# Altium PCB SSR_MODULE.PcbDoc
Units mil, origin at the board's own origin, x right, y up, seen from the top; angles counter-clockwise.
Board outline 1070 x 960 mil, 2 copper layers (Top Layer, Bottom Layer); 13 components, 10 nets, 27 pads, 0 vias.
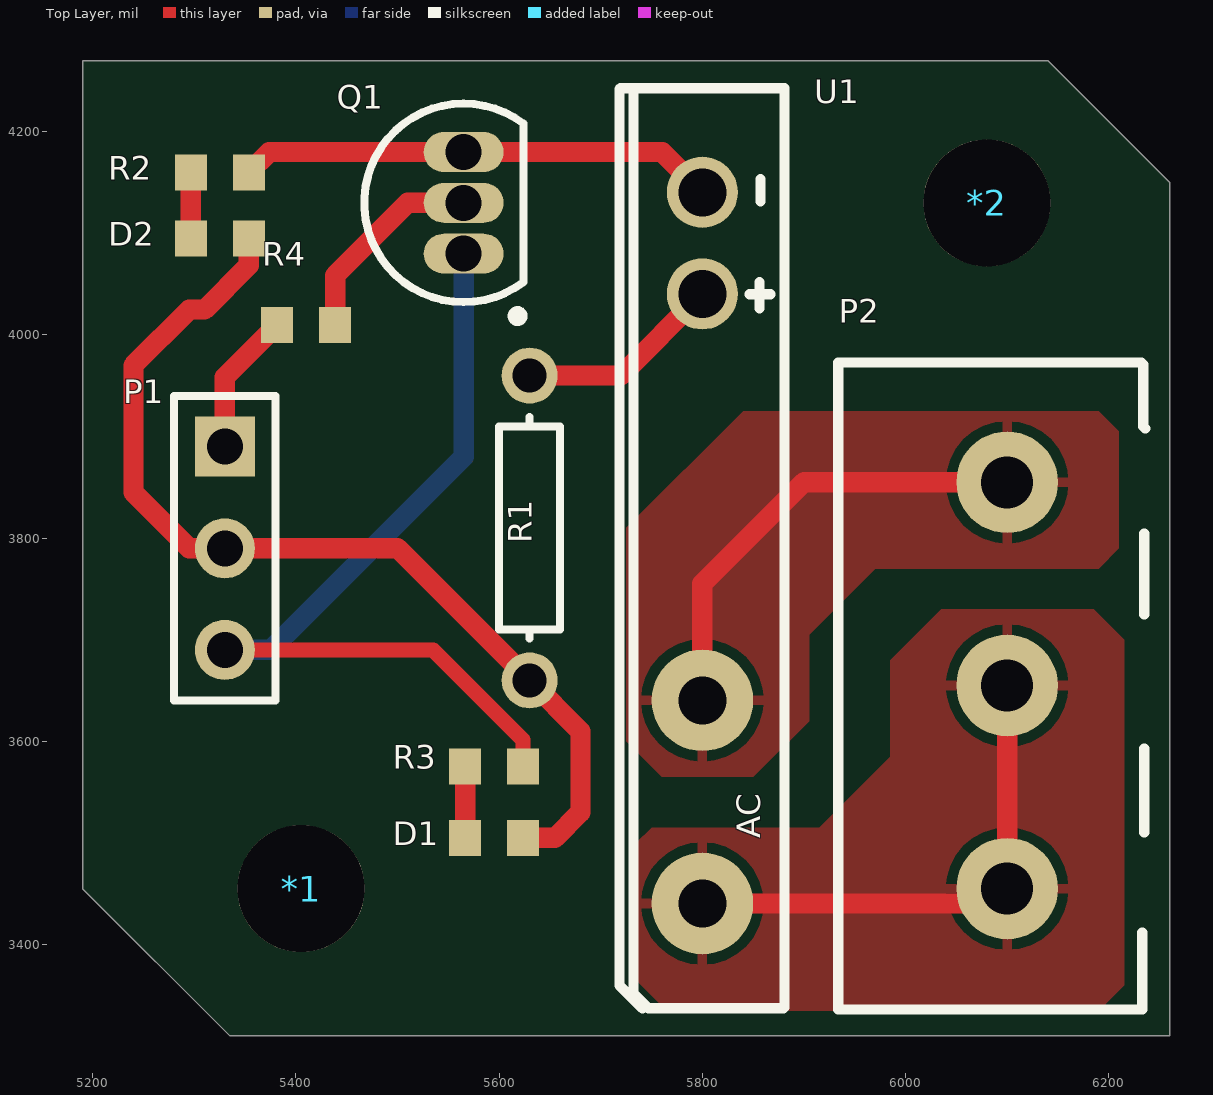
[diagram p0: Top Layer view]
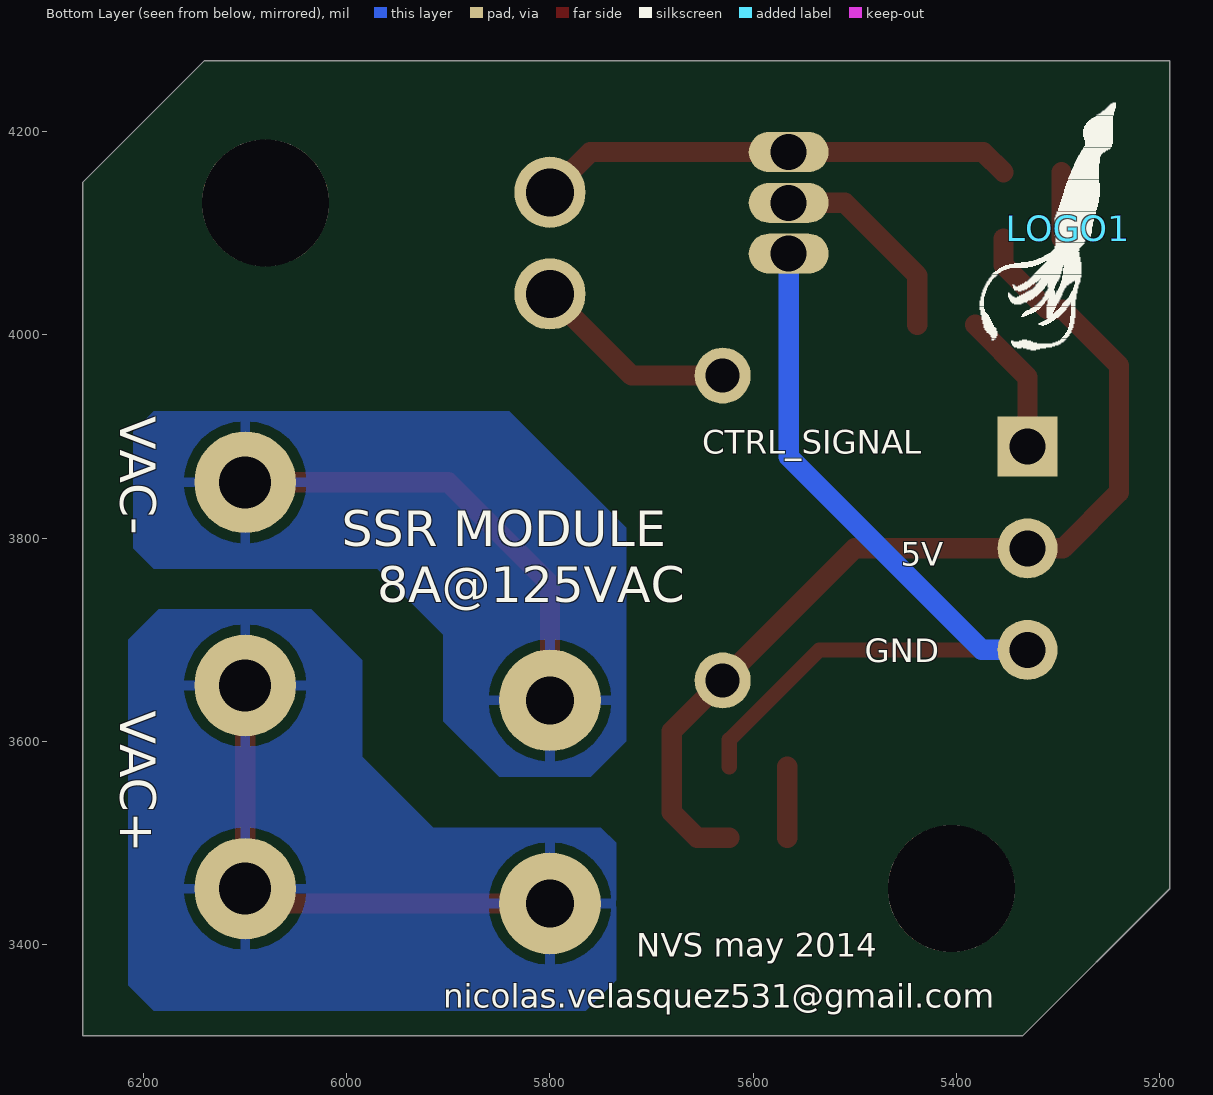
[diagram p1: Bottom Layer view, seen from below]

## Layer stack, top to bottom
Top Layer: signal copper 1.4
Dielectric: dielectric 12.6, FR-4, Dk 4.8
Bottom Layer: signal copper 1.4

## Board outline
5190,3455 5335,3310 6260,3310 6260,4150 6140,4270 5190,4270

## Design rules (kind name [scope] priority, off if disabled: settings)
Clearance [All] p1: gap=10
PolygonConnect [All] p1: connectstyle=Relief reliefconductorwidth=10 reliefentries=4 polygonreliefangle="90 Angle" airgapwidth=10
RoutingVias [All] p1: holewidth=28 width=50 viastyle="Through Hole" minholewidth=28 minwidth=50 maxholewidth=28 maxwidth=50
SolderMaskExpansion [All] p1: expansion=4
Width [All] p1: maxlimit=20 minlimit=10 preferedwidth=15
28 further rules are at their usual default settings.

## Components (designator, comment, footprint, x,y, rotation, side; value= is the part's Value field where it differs from the comment)
*1 "MountingHole-1/8in" MoutingHole-1/8in 5405,3455 r0 top
*2 "MountingHole-1/8in" MoutingHole-1/8in 6080,4130 r0 top
D1 "Green" R0603_L 5595,3505 r180 top
D2 "Green" R0603_L 5325,4095 r180 top
LOGO1 "Logo_DeepSea" DeepSea_logo1 5290,4105 r180 bottom
P1 "Header 3" HDR1X3 5330,3890 r270 top
P2 "BLOCK_CONNx3" BLOCK_CONNx3 6100,3655 r90 top
Q1 "2N3904" TO-92A 5565,4130 r0 top
R1 "Res1" AXIAL-0.3 5630,3810 r270 top
R2 "R_SMD" R0603_L 5325,4160 r180 top
R3 "R_SMD" R0603_L 5595,3575 r0 top
R4 "R_SMD" R0603_L 5410,4010 r180 top
U1 "S108T02F" ZC_4-ZSIP 5800,3790 r90 top

## Footprints (in the part's own frame and the unit in brackets; to place one, negate y for a bottom-side part, rotate by r counter-clockwise, add the part's x,y. Pads: shape width x height; smd on the part's side, far side on the other; paste and mask are expansions set on the pad)
AXIAL-0.3 [mm] "Axial Device, Thru-Hole; 2 Leads; 0.3 in Pin Spacing"
  round 1.4 hole 0.85: 1(-3.81,0) 2(3.81,0)
  silkscreen extent -2.77,-0.76 2.77,0.76
BLOCK_CONNx3 [mm]
  round 2.54 hole 1.3: 1(-5.08,0) 2(0,0) 3(5.08,0)
  silkscreen extent -8.1,-3.45 8.07,4.23, body extent -8.1,-3.4 8.1,4.2, height 10
DeepSea_logo1 [mil]
  silkscreen extent -87,-120 47,123
HDR1X3 [mm] "Connector; Header; 3 Position"
  rect 1.5x1.5 hole 0.9: 1(0,0)
  round 1.5 hole 0.9: 2(2.54,0) 3(5.08,0)
  silkscreen extent -1.27,-1.27 6.35,1.27
MoutingHole-1/8in [mil]
  round 125 hole 125: 0(0,0)
R0603_L [mm] "Chip Resistor, 2-Leads, Body 1,60x0,85mm, IPC High Density"
  rect 0.8x0.9 smd: 1(-0.725,0) 2(0.725,0)
  body extent -0.87,-0.48 0.87,0.48, height 0.45
TO-92A [mm] "TO, Flat Index; 3 In-Line, Axial Leads; Body Dia. 4.5mm; Leads 0.51 x 0.48 mm (max)"
  oval 2x1 hole 0.9: 1(0,-1.27) 2(0,0) 3(0,1.27)
  silkscreen extent -2.48,-2.95 1.5,2.48, body extent -2.5,-2.5 1.5,2.5, height 6.86
ZC_4-ZSIP [mm]
  round 2.54 hole 1.2: 1(-8.88,0) 2(-3.8,0)
  round 1.778 hole 1.2: 3(6.36,0) 4(8.9,0)
  silkscreen extent -11.5,-2.05 11.5,2.07, body extent -11.5,-2 11.5,2, height 17

## Part data
D1 D2: library part LED_SMD
P1: "Header, 3-Pin"
P2: "TERM BLOCK 5.08MM VERT 3POS PCB"
Q1: "NPN General Purpose Amplifier"
R1: "Resistor"
U1: "RELAY SSR 120VAC 8A ZC 4-SIP"

## Nets (pads, with @x,y where several pads share a name; then routed paths per layer and width w, separated by ;. In a path a pad name is that pad's centre, name@x,y a point inside that pad or via, vN(x,y) a via of type N, cw(c..) or ccw(c..) an arc to the next point about the centre after c; other vN are vias at no path point)
5V: D1.1 D2.1 P1.2 R1.2 | length 990
  Top Layer w20: D2.1 5353.54,4068.54 5310,4025 5295,4025 5240,3970 5240,3845 5295,3790 P1.2 5500,3790 R1.2 5680,3610 5680,3530 5655,3505 D1.1
CTRL_SIGNAL: P1.1 R4.2 | length 141.3
  Top Layer w20: P1.1 5330,3958.54 R4.2
GND: P1.3 Q1.1 R3.2 | length 870.4
  Top Layer w15: P1.3 5535,3690 5623.54,3601.46 R3.2
  Bottom Layer w20: P1.3 5375,3690 5565,3880 Q1.1
NetD1_2: D1.2 R3.1 | length 70
  Top Layer w20: D1.2 R3.1
NetD2_2: D2.2 R2.2 | length 65
  Top Layer w20: D2.2 R2.2
NetQ1_2: Q1.2 R4.1 | length 204.6
  Top Layer w20: R4.1 5438.54,4058.54 5510,4130 Q1.2
NetQ1_3: Q1.3 R2.1 U1.4 | length 471.1
  Top Layer w20: R2.1 5373.54,4180 Q1.3 5760.39,4180 U1.4
NetR1_1: R1.1 U1.3 | length 203.3
  Top Layer w20: R1.1 5719.61,3960 U1.3
VAC+: P2.1 P2.2 U1.1 | length 506.1
  Top Layer w20: U1.1 6085.39,3440.39 P2.1 P2.2
VAC-: P2.3 U1.2 | length 456
  Top Layer w20: U1.2 5800,3755 5900,3855 P2.3
pads on no net: *1.0 *2.0

## Polygon pours and split planes (outlines as drawn)
VAC- on Top Layer "Top Layer-No Net" (solid, remove dead copper, pour order 6): 5900,3925 6190,3925 6210,3905 6210,3790 6190,3770 5970,3770 5905,3705 5905,3620 5850,3565 5760,3565 5725,3600 5725,3810 5840,3925 5900,3925
VAC+ on Top Layer "Top Layer-No Net" (solid, remove dead copper, pour order 8): 5770,3515 5915,3515 5980,3580 5985,3585 5985,3670 5985,3680 6035,3730 6155,3730 6185,3730 6215,3700 6215,3380 6215,3360 6190,3335 5765,3335 5735,3365 5735,3500 5750,3515
VAC- on Bottom Layer "Top Layer-No Net" (solid, remove dead copper, pour order 5): 5900,3925 6190,3925 6210,3905 6210,3790 6190,3770 5970,3770 5905,3705 5905,3620 5850,3565 5760,3565 5725,3600 5725,3810 5840,3925 5900,3925
VAC+ on Bottom Layer "Top Layer-No Net" (solid, remove dead copper, pour order 7): 5770,3515 5915,3515 5980,3580 5985,3585 5985,3670 5985,3680 6035,3730 6155,3730 6185,3730 6215,3700 6215,3380 6215,3360 6190,3335 5765,3335 5735,3365 5735,3500 5750,3515

## Silkscreen, mask and mechanical layers (free items; w line width, h text height)
Bottom Overlay:
  text "VAC-" at 6235,3920 h60 r90
  text "CTRL_SIGNAL" at 5650,3875 h40
  text "SSR MODULE" at 6005,3780 h60
  text "5V" at 5455,3765 h40
  text "8A@125VAC" at 5970,3725 h60
  text "GND" at 5490,3670 h40
  text "VAC+" at 6235,3630 h60 r90
  text "NVS may 2014" at 5715,3380 h40
  text "nicolas.velasquez531@gmail.com" at 5905,3330 h40
Mechanical 1:
  the board outline again, w10

## Text inside footprints (layer, text, board x,y; h text height)
U1: Top Overlay "AC" at 5864.96,3504.57 h40 r90